# Altium PCB PIR Sensor driver.PcbDoc
Units mm, origin at the board's own origin, x right, y up, seen from the top; angles counter-clockwise.
Board outline 152.4 x 101.6 mm, 2 copper layers (Top Layer, Bottom Layer); 11 components, 8 nets, 31 pads, 0 vias.
Unrouted connection lines stored in the file: 20.
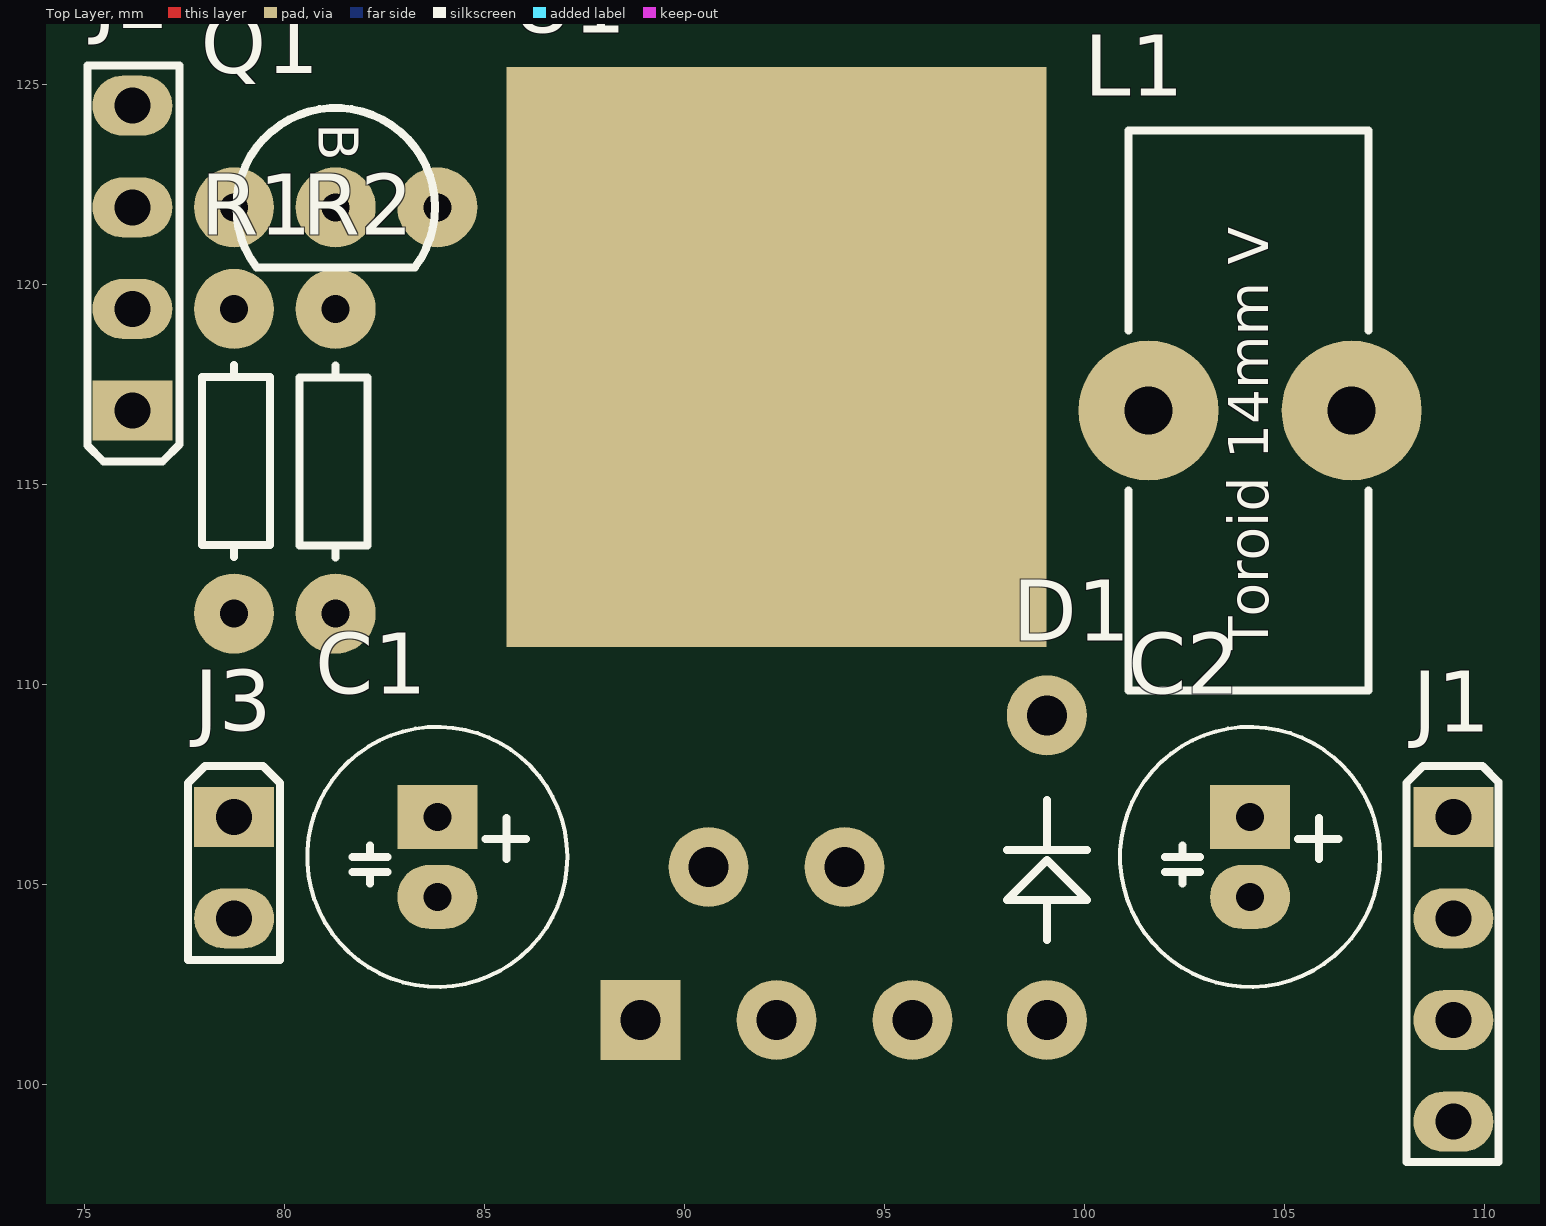
[diagram p0: Top Layer view]
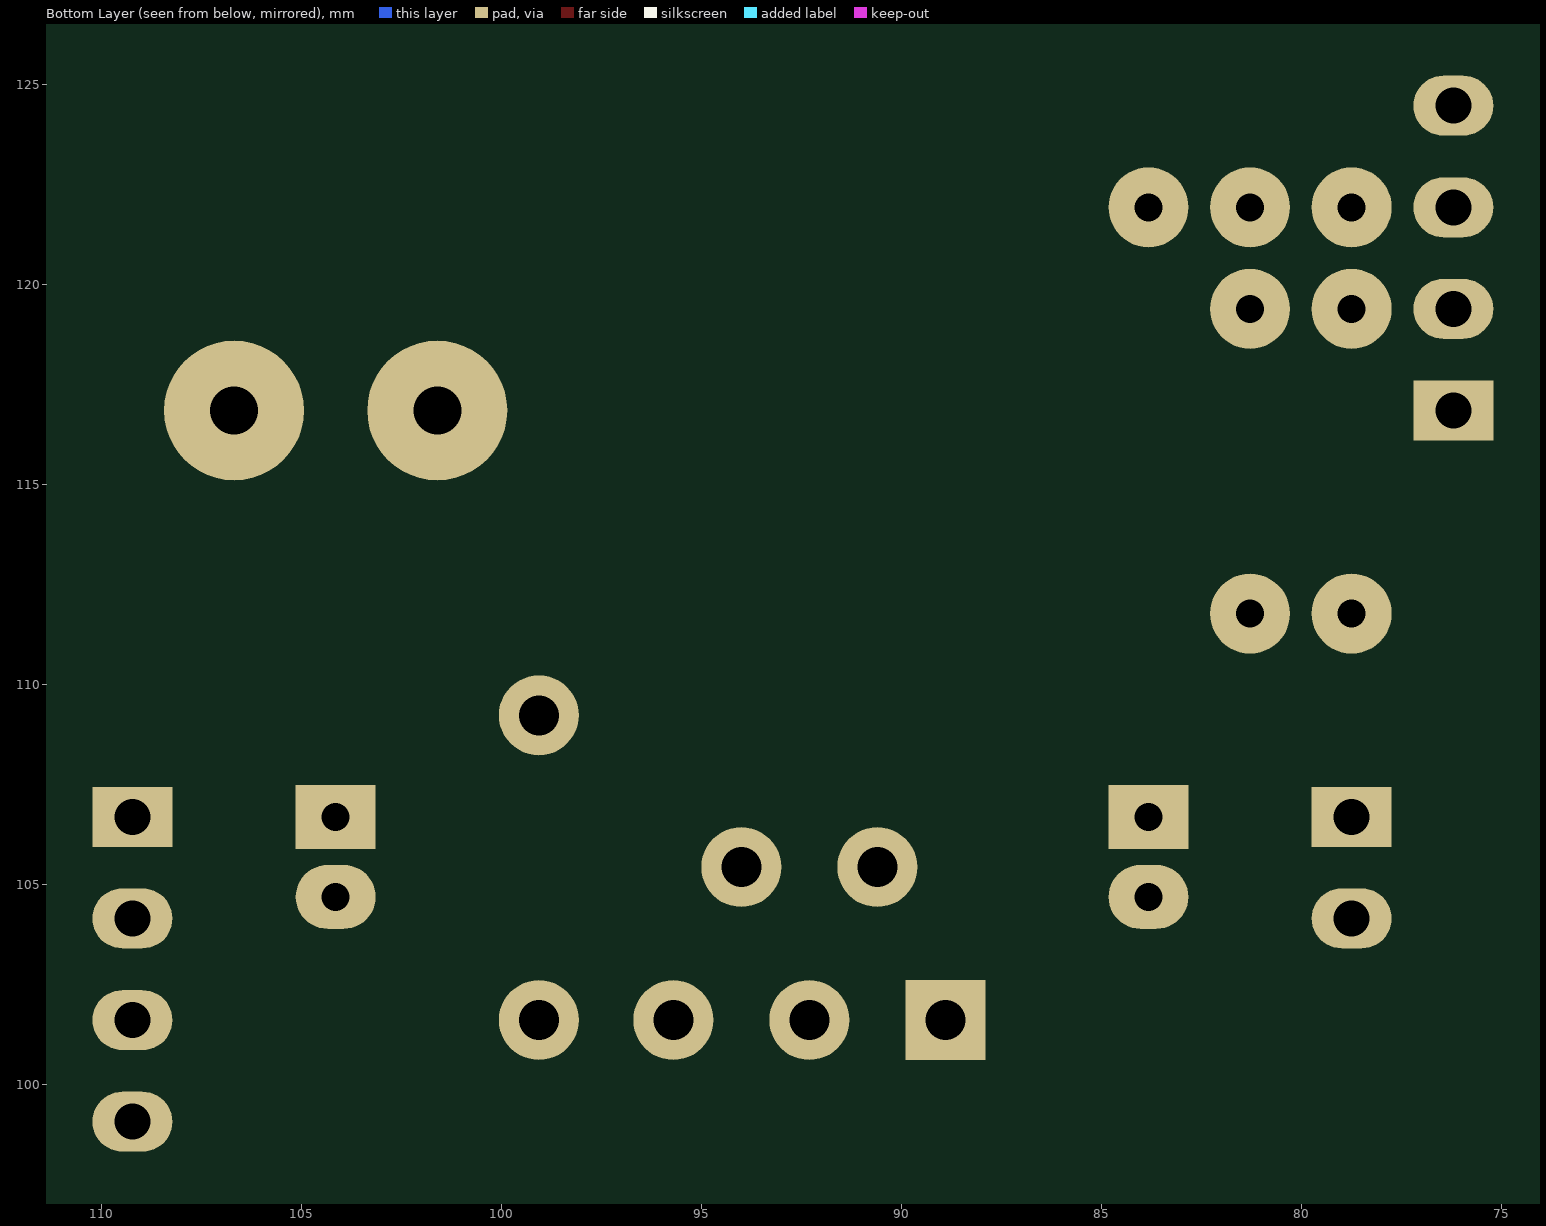
[diagram p1: Bottom Layer view, seen from below]

## Layer stack, top to bottom
Top Solder: solder mask 0.0102, Solder Resist, Dk 3.5
Top Layer: signal copper 0.0356
Dielectric 1: dielectric 0.32, FR-4, Dk 4.8
Bottom Layer: signal copper 0.0356
Bottom Solder: solder mask 0.0102, Solder Resist, Dk 3.5

## Board outline
25.4,25.4 177.8,25.4 177.8,127 25.4,127

## Design rules (kind name [scope] priority, off if disabled: settings)
Clearance [All] p1: gap=0.254
PolygonConnect [All] p1: connectstyle=Relief reliefconductorwidth=0.254 reliefentries=4 polygonreliefangle="90 Angle" airgapwidth=0.254
RoutingVias [All] p1: holewidth=0.711 width=1.27 viastyle="Through Hole" minholewidth=0.711 minwidth=1.27 maxholewidth=0.711 maxwidth=1.27
SolderMaskExpansion [All] p1: expansion=0.102
Width [All] p1: maxlimit=0.254 minlimit=0.254 preferedwidth=0.254
29 further rules are at their usual default settings.

## Components (designator, comment, footprint, x,y, rotation, side; value= is the part's Value field where it differs from the comment)
C1 "220mF 16v" "Cap E p2mm D6.5xH11" 83.82,106.68 r270 top
C2 "220mF 16v" "Cap E p2mm D6.5xH11" 104.14,106.68 r270 top
D1 "1N5819" "Diode DO-35" 99.06,101.6 r90 top
J1 "PLS-4" "Line 2.54 X 4" 109.22,106.68 r0 top
J2 "PLS-4" "Line 2.54 X 4" 76.2,116.84 r180 top
J3 "PLS-2" "Line 2.54 x 2" 78.74,106.68 r0 top
L1 "Inductor V" "Toroid V D14-W6" 101.6,116.84 r0 top
Q1 "S9014" "TO-92 2.54 (EBC)" 81.28,121.92 r270 top
R1 "560 Om" "Res p7.62 (4p) 0.25w" 78.74,119.38 r270 top
R2 "1 kOm" "Res p7.62 (4p) 0.25w" 81.28,111.76 r90 top
U1 "LM2596T-5.0" "TO220-5 Horisontal" 88.9,101.6 r270 top

## Footprints (in the part's own frame and the unit in brackets; to place one, negate y for a bottom-side part, rotate by r counter-clockwise, add the part's x,y. Pads: shape width x height; smd on the part's side, far side on the other; paste and mask are expansions set on the pad)
"Cap E p2mm D6.5xH11" [mm] "D 6.5mm; H 11mm"
  rect 1.6x2 hole 0.7: 1(0,0)
  oval 1.6x2 hole 0.7: 2(2,0)
  silkscreen extent -2.25,-3.25 4.25,3.25, body extent -2.22,-3.22 4.27,3.28, height 11.49
"Diode DO-35" [mm] "p7.62mm"
  round 2 hole 1: A(0,0) K(7.62,0)
  silkscreen extent 2,-1 5.5,1, body extent -0.32,-1 7.82,1.02, height 2.21
"Line 2.54 x 2" [mm]
  rect 2x1.5 hole 0.9: 1(0,0)
  oval 2x1.5 hole 0.9: 2(0,-2.54)
  silkscreen extent -1.15,-3.57 1.15,1.28, body extent -1.25,-3.69 1.25,1.39, height 8.3
"Line 2.54 X 4" [mm]
  rect 2x1.5 hole 0.9: 1(0,0)
  oval 2x1.5 hole 0.9: 2(0,-2.54) 3(0,-5.08) 4(0,-7.62)
  silkscreen extent -1.17,-8.62 1.12,1.27, body extent -1.25,-8.78 1.25,1.38, height 8.2
"Res p7.62 (4p) 0.25w" [mm] "L p7.62; horisontal"
  round 2 hole 0.7: 1(0,0) 2(7.62,0)
  silkscreen extent 1.4,-0.8 6.2,0.9, body extent -0.3,-1 7.8,1, height 2.1
"TO220-5 Horisontal" [mm]
  rect 2x2 hole 1: 1(0,0)
  round 2 hole 1: 2(-3.825,1.7) 3(0,3.4) 4(-3.825,5.1) 5(0,6.8)
  rect 14.5x13.5 smd: 11(-16.575,3.4)
  body extent -21.9,-1.8 0.33,8.6, height 5
"TO-92 2.54 (EBC)" [mm] "TO, Flat Index; 3 In-Line, Axial Leads; Body Dia. 4.5mm; Leads 0.51 x 0.48 mm (max)"
  round 2 hole 0.7: B(0,0) C(0,2.54) E(0,-2.54)
  silkscreen extent -2.48,-2.48 1.5,2.48, body extent -2.37,-2.79 1.6,2.79, height 5.7
"Toroid V D14-W6" [mm] "10mm Black ring TEC.ORG"
  round 3.5 hole 1.2: 1(0,0) 2(5.08,0)
  silkscreen extent -0.5,-7 5.5,7

## Part data
C1 C2: library part "Cap E 220mF x 16V", "Capacitor"
D1: library part "Diode 1N5819", "1 Amp General Purpose Rectifier"
J1 J2 J3: "Vert, Sgl line, Male"
L1: "Inductor Vertical"
Q1: "NPN Bipolar Transistor"
R1 R2: library part "Res Carbon"
U1: "Voltage Regulator"

## Nets (pads, with @x,y where several pads share a name; then routed paths per layer and width w, separated by ;. In a path a pad name is that pad's centre, name@x,y a point inside that pad or via, vN(x,y) a via of type N, cw(c..) or ccw(c..) an arc to the next point about the centre after c; other vN are vias at no path point)
5V: C2.1 J1.1 L1.2 U1.4
"12V IN": C1.1 J2.4 Q1.C U1.1
"ALARM OUT 12V": J2.3 Q1.E R1.1
GND: C1.2 C2.2 D1.A J1.2 J2.2 J3.2 U1.3 U1.5
NetD1_K: D1.K L1.1 U1.2
NetJ3_1: J3.1 R1.2
NetQ1_B: Q1.B R2.2
"SENSOR OUT": J1.3 R2.1
pads on no net: J1.4 J2.1 U1.11

## Text inside footprints (layer, text, board x,y; h text height)
L1: Top Overlay "Toroid 14mm V" at 104.6,110.84 h1 r90
Q1: Top Overlay "B" at 80.855,124.02 h1 r270